# Altium PCB TechnoPoliceBadge.PcbDoc
Units mm, origin at the board's own origin, x right, y up, seen from the top; angles counter-clockwise.
Board outline 31.18 x 36 mm, 2 copper layers (Top Layer, Bottom Layer), stack 1.541 mm thick; 12 components, 3 nets, 50 pads, 13 vias.
Unrouted connection lines stored in the file: 1.
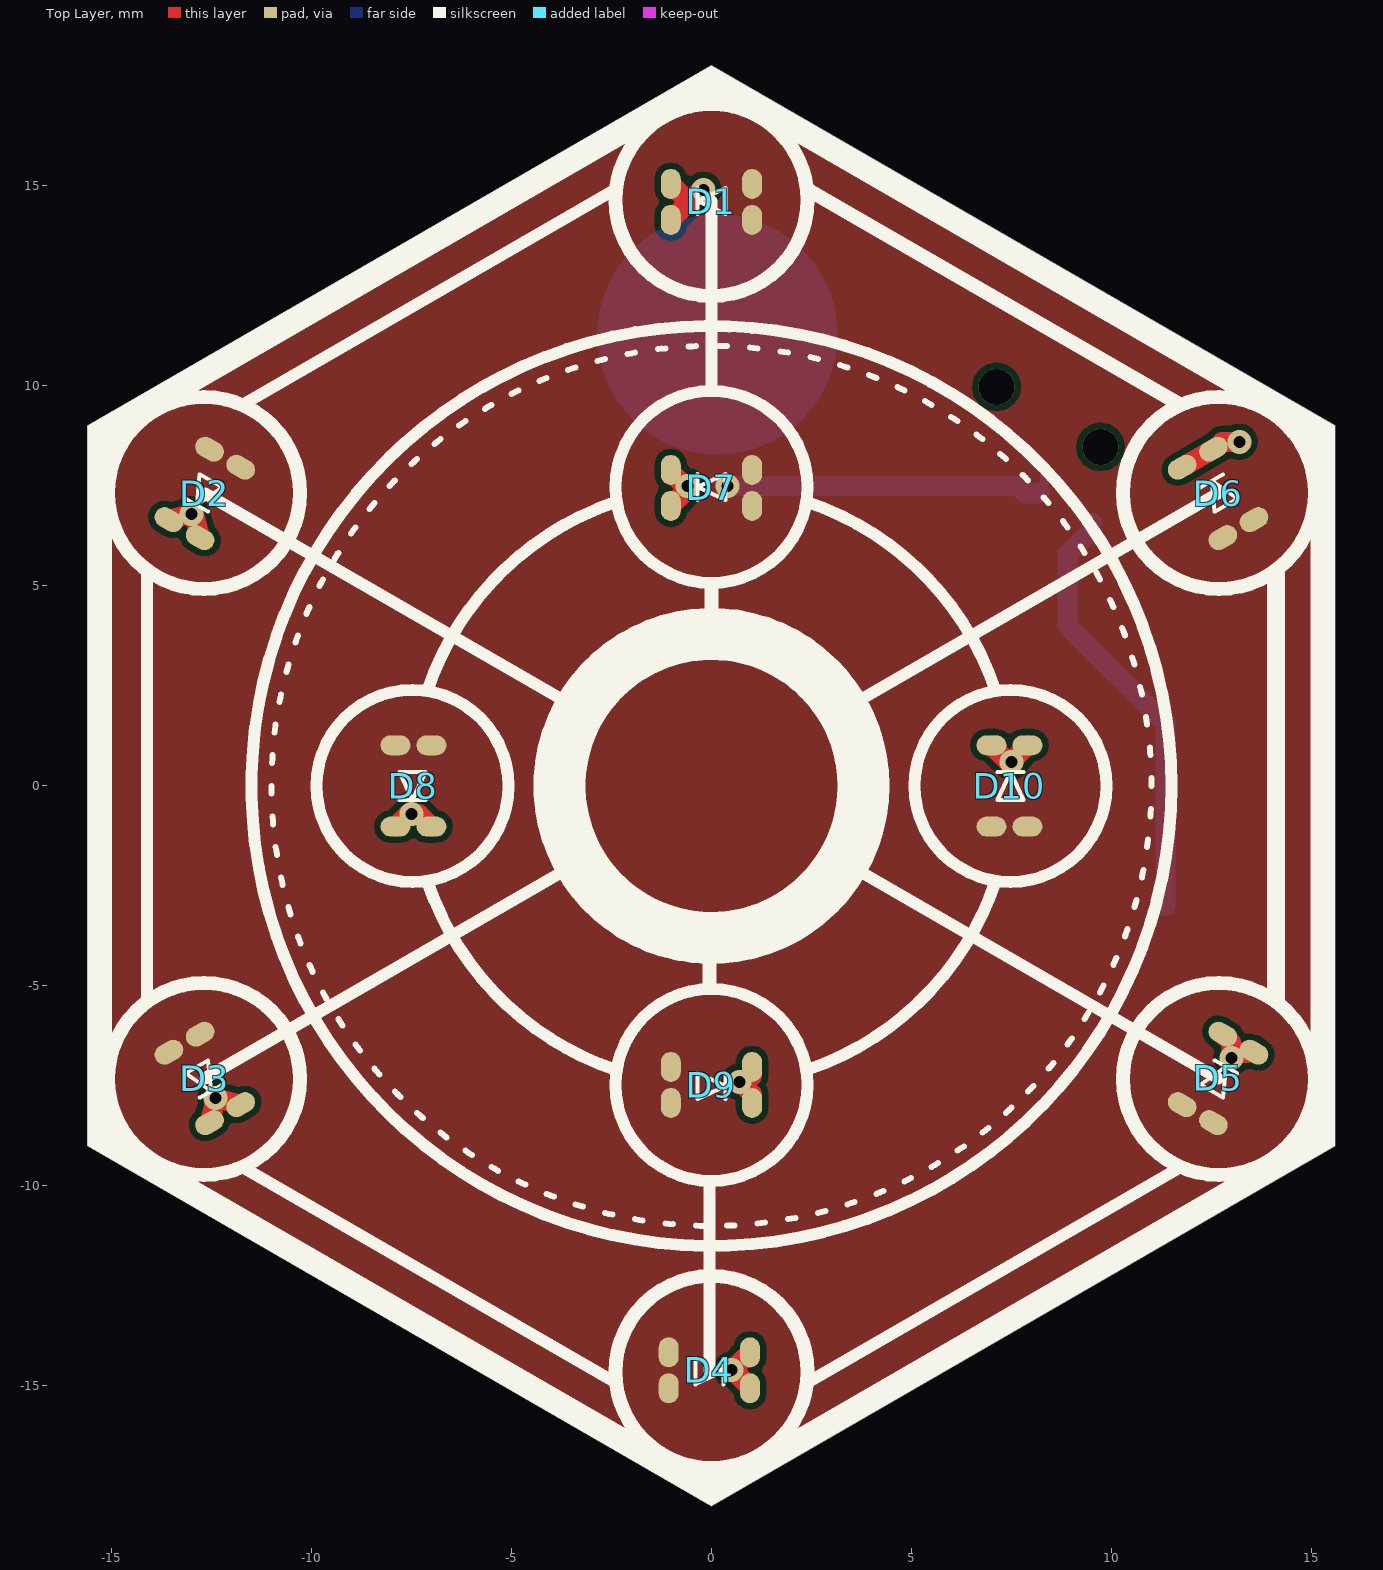
[diagram p0: Top Layer view]
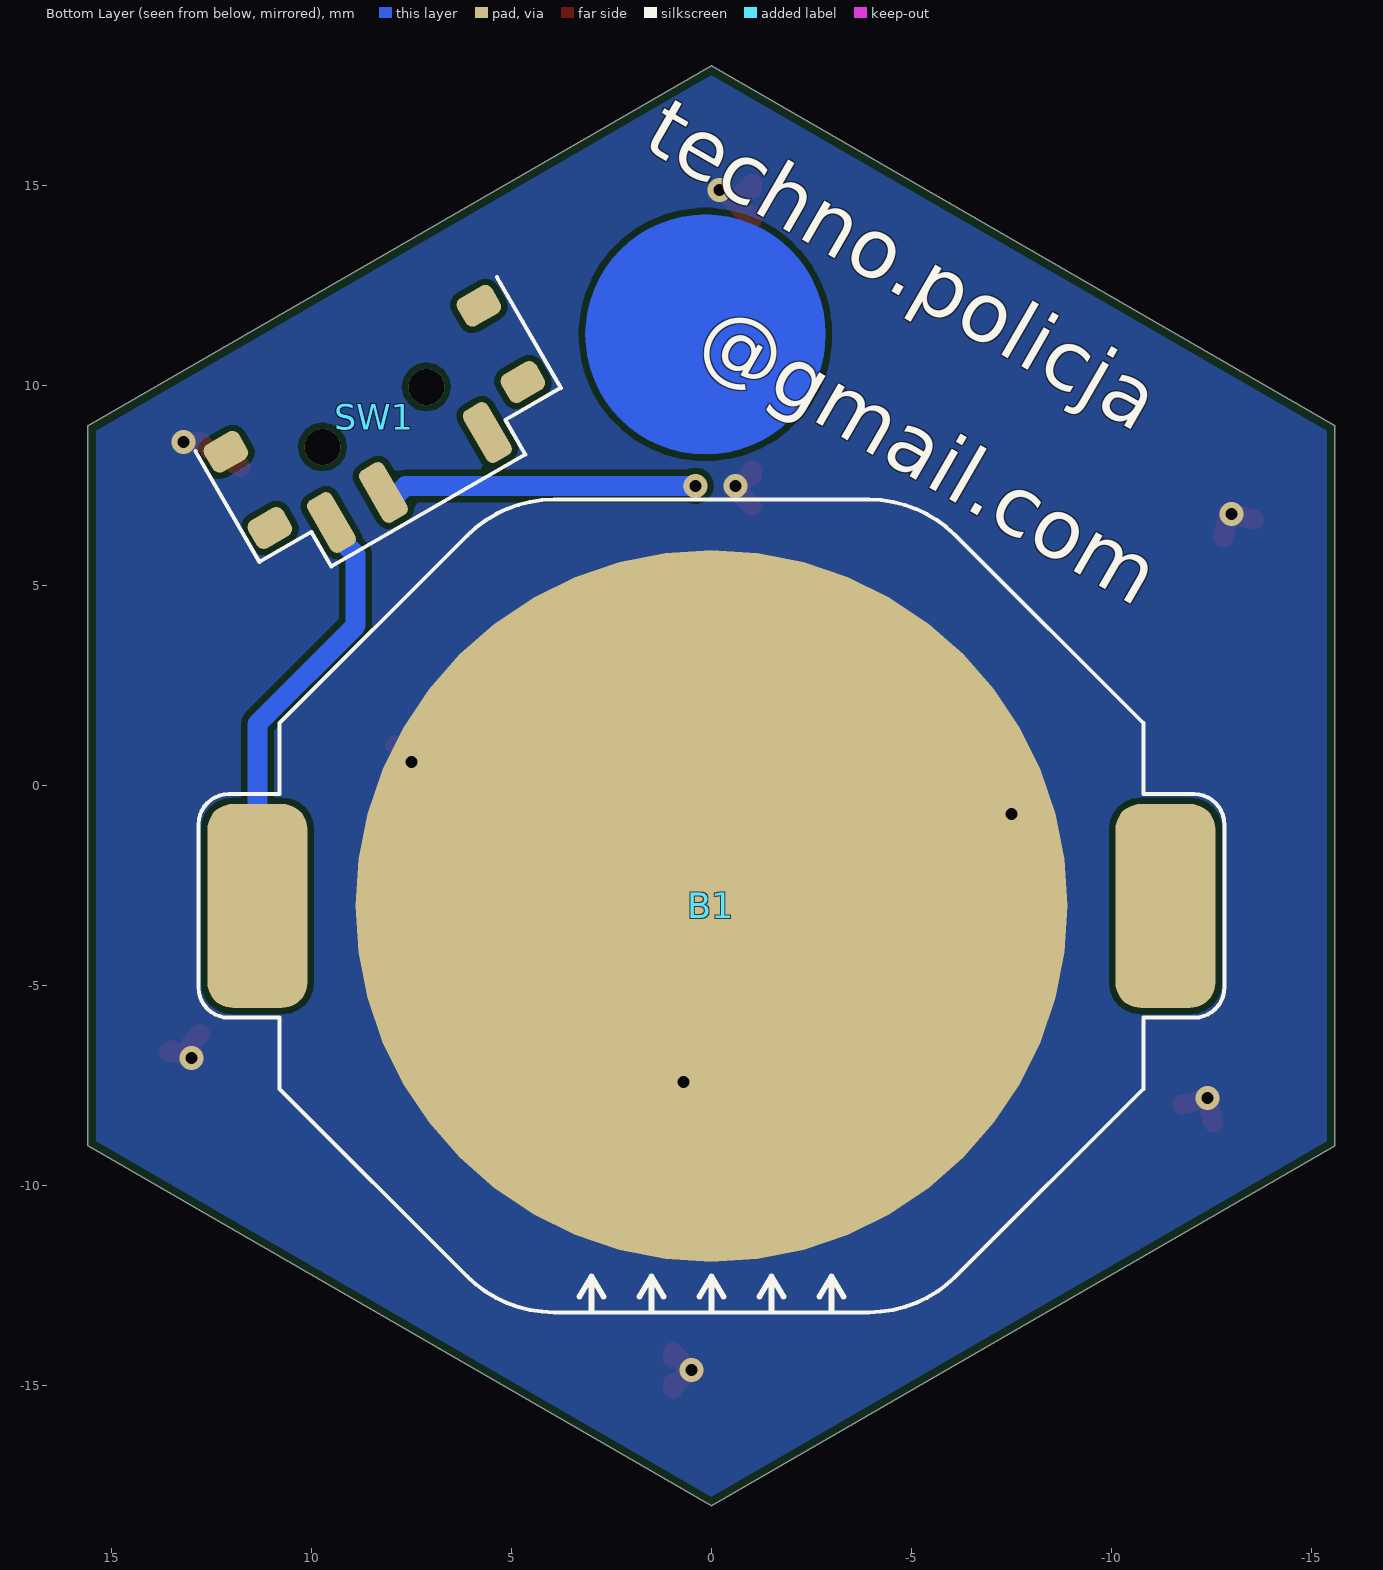
[diagram p1: Bottom Layer view, seen from below]

## Layer stack, top to bottom
Top Solder: solder mask 0.0102, Solder Resist, Dk 3.5
Top Layer: signal copper 0.0356
Dielectric 1: dielectric 1.47, FR-4, Dk 4.8
Bottom Layer: signal copper 0.0356
Bottom Solder: solder mask 0.0102, Solder Resist, Dk 3.5

## Board outline
-15.588,-9 0,-18 15.588,-9 15.588,9 0,18 -15.588,9

## Design rules (kind name [scope] priority, off if disabled: settings)
AssemblyTestPointUsage [All] p1: valid=2
AssemblyTestpoint [All] p1: testpointundercomponent=TRUE minsize=1.016 maxsize=2.54 preferedsize=1.524 minholesize=0 maxholesize=1.016 preferedholesize=0.813 testpointgrid=0.025 usegrid=FALSE gridtolerance=0 allowsidebottom=TRUE minspacing=3.13
BoardOutlineClearance [All] p1: gap=0.2 ignorepadtopadclearanceinfootprint=FALSE
Clearance [All] p1: gap=0.15 ignorepadtopadclearanceinfootprint=FALSE
ComponentClearance [All] p1: gap=0.25 collisioncheckmode=3 verticalgap=0.2 showdistances=TRUE
DiffPairsRouting [All] p1: maxlimit=0.254 minlimit=0.152 mostfreqgap=0.152 toplayer_minwidth=0.178 toplayer_maxwidth=0.381 toplayer_prefwidth=0.178 bottomlayer_minwidth=0.178 bottomlayer_maxwidth=0.381 bottomlayer_prefwidth=0.178 maxuncoupledlength=12.7
FabricationTestPointUsage TestPointUsage [All] p1: valid=0 allowmultiple=FALSE
FabricationTestpoint Testpoint [All] p1: side=2 testpointundercomponent=TRUE minsize=1.016 maxsize=2.54 preferedsize=1.524 minholesize=0.508 maxholesize=1.016 preferedholesize=0.813 testpointgrid=0.025 allowsidebottom=TRUE usegrid=FALSE gridtolerance=0 minspacing=2.35
Height [All] p1: minheight=0 maxheight=100 prefheight=12.7
HoleSize [All] p1: absolutevalues=TRUE maxlimit=10 minlimit=0.3 maxpercent=80.000 minpercent=20.000
HoleToHoleClearance [All] p1: gap=0.25 allowstackedmicrovias=TRUE
MinimumAnnularRing [All] p1: minimumring=0.15
MinimumSolderMaskSliver [All] p1: minsoldermaskwidth=0
PlaneConnect [All] p1: planeconnectstyle=Direct reliefexpansion=0.508 reliefentries=4 reliefconductorwidth=0.254 reliefairgap=0.254
PolygonConnect [All] p1: connectstyle=Direct reliefconductorwidth=0.381 reliefentries=4 polygonreliefangle="45 Angle" airgapwidth=0.254
RoutingVias [All] p1: holewidth=0.3 width=0.5 viastyle="Through Hole" minholewidth=0.3 minwidth=0.5 maxholewidth=20 maxwidth=30
SilkToSolderMaskClearance [IsPad] p1: minsilkscreentomaskgap=0.076 clearancetoexposedcopper=TRUE
SolderMaskExpansion [All] p1: expansion=0.102 istentingtop=FALSE
UnRoutedNet [All] p1: checkbadconnections=TRUE
Width [All] p1: maxlimit=5.08 minlimit=0.15 preferedwidth=0.15
17 further rules are at their usual default settings.

## Components (designator, comment, footprint, x,y, rotation, side; value= is the part's Value field where it differs from the comment)
B1 "BAT-HLD-001-TR" BAT-HLD-001 0,-3 r0 bottom
D1 "OL_RGB_IC_0807" OL_0807 0,14.625 r0 top
D2 "OL_RGB_IC_0807" OL_0807 -12.687,7.325 r60 top
D3 "OL_RGB_IC_0807" OL_0807 -12.687,-7.325 r120 top
D4 "OL_RGB_IC_0807" OL_0807 -0.053,-14.635 r180 top
D5 "OL_RGB_IC_0807" OL_0807 12.687,-7.325 r240 top
D6 "OL_RGB_IC_0807" OL_0807 12.687,7.325 r300 top
D7 "OL_RGB_IC_0807" OL_0807 0,7.475 r0 top
D8 "OL_RGB_IC_0807" OL_0807 -7.475,0 r90 top
D9 "OL_RGB_IC_0807" OL_0807 0,-7.5 r180 top
D10 "OL_RGB_IC_0807" OL_0807 7.475,0 r270 top
SW1 "MSK-12C01-07" MSK-12C01-07 8.427,9.225 r330 bottom

## Footprints (in the part's own frame and the unit in brackets; to place one, negate y for a bottom-side part, rotate by r counter-clockwise, add the part's x,y. Pads: shape width x height; smd on the part's side, far side on the other; paste and mask are expansions set on the pad)
BAT-HLD-001 [mm]
  round 17.8 smd mask+0.05: NEG(0,0)
  rrect50% 2.5x5.1 smd mask+0.05: POS(-11.35,0) POS(11.35,0)
  silkscreen extent -12.83,-10.16 12.83,10.16, body extent -11.45,-10 11.45,10, height 3.5
MSK-12C01-07 [mm]
  rrect50% 0.7x1.5 smd mask+0.05: 1(-2.25,1.75) 2(0.75,1.75) 3(2.25,1.75)
  rrect50% 1x0.8 smd mask+0.05: 4(-3.65,1.1) 5(-3.65,-1.1) 6(3.65,1.1) 7(3.65,-1.1)
  silkscreen extent -4.4,-1.5 4.3,2.7, body extent -3.95,-2.9 3.95,2.5, height 1.5
OL_0807 [mm]
  oval 0.5x0.75 smd mask+0.05: 1(-1.016,-0.475) 1(-1.016,0.425) 2(1.016,-0.475) 2(1.016,0.425)
  silkscreen extent -0.35,-0.33 0.35,0.33, body extent -1.02,-0.93 1.04,0.88, height 0.85

## Part data
B1: "Coin Cell Battery Holders Linx CR2032 Battery Holder, Tape n Reel", Case/Package=SMD, Manufacturer="Linx Technologies", Max Operating Temperature=0°C, Supplier Part Number 1=712-BAT-HLD-001-TR, HelpURL=https://pl.mouser.com/datasheet/2/238/bat-hld-001-1659379.pdf, Manufacturer Part Number=BAT-HLD-001-TR, Min Operating Temperature=0°C, Mount="Surface Mount", Part Number=BAT-HLD-001-TR, Status=MK, Supplier 1=Mouser
D1 D2 D3 D4 D5 D6 D7 D8 D9 D10: "RGB Diode with integrated driver. Fast Flashing", Case/Package=0807, Color=RGB, Manufacturer=Aliexpress, Manufacturer Part Number=None, Max Operating Temperature=85, Height=0.8, HelpURL=https://www.aliexpress.com/item/32771234486.html?spm=a2g0s.9042311.0.0.33ca4c4d1FJqnV, Mount="Surface Mount", Number of Pins=4, Part Number=OL_RGB_IC_0807, Status=MK, Supplier 1=Aliexpress
SW1: "SMT Slide Switch", Max Current=100mA, Max Voltage Rating (DC)=50V, Height=1.5mm, HelpURL=https://www.aliexpress.com/item/32856542440.html?spm=a2g0s.9042311.0.0.33ca4c4d1FJqnV, Manufacturer Part Number=MSK-12C01-07, Mount="Surface Mount", Orientation=Horizontal, Part Number=MSK-12C01-07, Status=MK, Supplier 1=Aliexpress, Switch Function=On-On, Throw Configuration=SP-DT

## Via types
v1: diameter 0.6, hole 0.3, Top Layer to Bottom Layer, tented both sides, 11 vias
v2: diameter 0.9, hole 0.9, Top Layer to Bottom Layer, tented both sides, 2 vias

## Nets (pads, with @x,y where several pads share a name; then routed paths per layer and width w, separated by ;. In a path a pad name is that pad's centre, name@x,y a point inside that pad or via, vN(x,y) a via of type N, cw(c..) or ccw(c..) an arc to the next point about the centre after c; other vN are vias at no path point)
NetB1_NEG: B1.NEG D1.1 D2.1 D3.1 D4.1 D5.1 D6.1 D7.1 D8.1 D9.1 D10.1 | length 13.8
  Top Layer w0.5: D2.1@-13.563,6.658 -13.01,6.806 v1(-13,6.8) -12.932,6.761 D2.1@-12.784,6.208 ; D3.1@-12.547,-8.417 -12.383,-7.805 -12.383,-7.803 D3.1@-11.768,-7.967 ; D8.1@-7.9,-1.016 -7.584,-0.7 v1(-7.5,-0.7) -7.316,-0.7 D8.1@-7,-1.016 ; D7.1@-1.016,7 -0.6,7.416 v1(-0.6,7.5) -0.67,7.5 -0.945,7.775 -1.016,7.775 D7.1@-1.016,7.9 ; D1.1@-1.016,14.15 -1.016,14.275 -0.893,14.275 -0.567,14.601 -0.268,14.9 v1(-0.2,14.9) ; D1.1@-1.016,15.05 -1.016,14.925 -0.891,14.925 -0.6,14.634 ; D4.1@0.963,-15.06 0.963,-14.935 0.872,-14.935 0.579,-14.642 0.579,-14.544 0.838,-14.285 0.963,-14.285 D4.1@0.963,-14.16 ; D9.1@1.016,-7.925 1.016,-7.7 0.791,-7.475 1.016,-7.25 D9.1@1.016,-7.025 ; D10.1@7,1.016 7.125,1.016 7.125,0.891 7.45,0.566 D10.1@7.9,1.016 ; 12.186,8.209 11.768,7.967 D6.1@12.547,8.417 ; D6.1@12.767,8.6 v1(13.2,8.6) ; D5.1@12.784,-6.208 13,-6.424 v1(13,-6.8) 13.123,-6.677 13.404,-6.677 13.471,-6.611 13.516,-6.611 D5.1@13.563,-6.658
  other v1: 0.5,-14.6 -12.4,-7.8 0.7,-7.4 7.5,0.6
NetB1_POS: B1.POS SW1.3 | length 10.9
  Bottom Layer w0.5: SW1.3 9.5,6.386 8.895,5.781 8.895,4.006 11.35,1.552 B1.POS@11.35,-3
NetD1_2: D1.2 D2.2 D3.2 D4.2 D5.2 D6.2 D7.2 D8.2 D9.2 D10.2 SW1.2 | length 8.6
  Bottom Layer w0.2: SW1.2 8.308,7.442 SW1.2@8.308,7.99
  Bottom Layer w0.5: v1(0.4,7.5) 7.651,7.5 7.837,7.314 8.18,7.314 SW1.2
pads on no net: SW1.1 SW1.4 SW1.5 SW1.6 SW1.7
copper on no net:
  other v2: 9.726,8.475 7.127,9.975

## Polygon pours and split planes (outlines as drawn)
NetD1_2 on Top Layer "NETD1_2_L01_P000" (solid, pour order 0): -15.588,-9 0,-18 15.588,-9 15.588,9 0,18 -15.588,9
NetB1_NEG on Bottom Layer "NETB1_NEG_L02_P001" (solid, pour order 1): -15.588,-9 0,-18 15.588,-9 15.588,9 0,18 -15.588,9

## Other copper
Top Layer:
  text "'.Layer_Name'" at 24.012,3.122 h2.5
Bottom Layer:
  region: -2.85,11.287 ccw(c0.15,11.287) 0.15,8.287 ccw(c0.15,11.287) 3.15,11.287 ccw(c0.15,11.287) 0.15,14.287 ccw(c0.15,11.287)
  text "'.Layer_Name'" at 24.012,0.622 h2.5

## Silkscreen, mask and mechanical layers (free items; w line width, h text height)
Top Overlay:
  drawing of 126 lines, arcs and shapes, not listed
  text "'.Layer_Name'" at 24.012,-3.878 h2.5
Bottom Overlay:
  text "techno.policja" at 1.782,15.99 h1.5 r30
  text "@gmail.com" at 0.445,10.858 h1.5 r30
  text "'.Layer_Name'" at 51.612,-3.878 h2.5
Top Paste:
  text "'.Layer_Name'" at 24.012,-6.378 h2.5
Bottom Paste:
  text "'.Layer_Name'" at 51.612,-6.378 h2.5
Top Solder:
  text "'.Layer_Name'" at 24.012,-8.878 h2.5
Bottom Solder:
  text "'.Layer_Name'" at 51.612,-8.878 h2.5
Board:
  the board outline again, w0.15
  text "'.Layer_Name'" at 24.012,-1.878 h2.5
Top Assembly:
  text "'.Layer_Name' (Ignore)" at 24.012,-11.378 h2.5
Bottom Assembly:
  text "'.Layer_Name' (Ignore)" at 51.612,-11.378 h2.5
Top Courtyard:
  text "'.Layer_Name' (Ignore)" at 24.012,-13.878 h2.5
Bottom Courtyard:
  text "'.Layer_Name' (Ignore)" at 51.612,-13.878 h2.5
Drill Drawing:
  circle w0.254: c29.356,13.39 r0.847
  lines w0.254: 28.509,16.354 30.203,16.354 30.203,18.047 28.509,18.047 28.509,16.354
  lines w0.381: 26.99,11.401 295.496,11.401 ; 26.99,19.021 295.496,19.021 ; 40.983,7.591 40.983,22.831 ; 54.441,7.591 54.441,22.831 ; 82.373,7.591 82.373,22.831 ; 95.222,7.591 95.222,22.831 ; 113.861,7.591 113.861,22.831 ; 151.95,7.591 151.95,22.831 ; 166.932,7.591 166.932,22.831 ; 185.875,7.591 185.875,22.831 ; 204.92,7.591 204.92,22.831 ; 226.605,7.591 226.605,22.831 ; 260.479,7.591 260.479,22.831 ; 26.99,7.591 295.496,7.591 295.496,22.831 26.99,22.831 26.99,7.591
  text "Symbol" at 29.276,20.164 h1.83
  text "Count" at 42.126,20.164 h1.83
  text "Hole Size" at 55.584,20.164 h1.83
  text "Plated" at 83.516,20.164 h1.83
  text "Hole Type" at 96.365,20.164 h1.83
  text "Drill Layer Pair" at 115.004,20.164 h1.83
  text "Via/Pad" at 153.093,20.164 h1.83
  text "Pad Shape" at 168.075,20.164 h1.83
  text "Template" at 187.018,20.164 h1.83
  text "Description" at 206.063,20.164 h1.83
  text "Hole Tolerance (+)" at 227.748,20.164 h1.83
  text "Hole Tolerance (-)" at 261.622,20.164 h1.83
  text "2" at 42.126,16.354 h1.52
  text "0.900mm (35.43mil)" at 55.584,16.354 h1.52
  text "PTH" at 83.516,16.354 h1.52
  text "Round" at 96.365,16.354 h1.52
  text "Top Layer - Bottom Layer" at 115.004,16.354 h1.52
  text "Via" at 153.093,16.354 h1.52
  text "Rounded" at 168.075,16.354 h1.52
  text "v90h90m0mx0" at 187.018,16.354 h1.52
  text "11" at 42.126,12.544 h1.52
  text "0.300mm (11.81mil)" at 55.584,12.544 h1.52
  text "PTH" at 83.516,12.544 h1.52
  text "Round" at 96.365,12.544 h1.52
  text "Top Layer - Bottom Layer" at 115.004,12.544 h1.52
  text "Via" at 153.093,12.544 h1.52
  text "Rounded" at 168.075,12.544 h1.52
  text "v60h30m0mx0" at 187.018,12.544 h1.52
  text "13 Total" at 42.126,8.734 h1.52

## Dimensions
-15.588,9 to 15.588,9 on Board
0,18 to 0,-18 on Board